# Altium PCB PCB1.PcbDoc
Units mm, origin at the board's own origin, x right, y up, seen from the top; angles counter-clockwise.
Board outline 55 x 64 mm, 2 copper layers (Top Layer, Bottom Layer); 45 components, 38 nets, 202 pads, 156 vias.
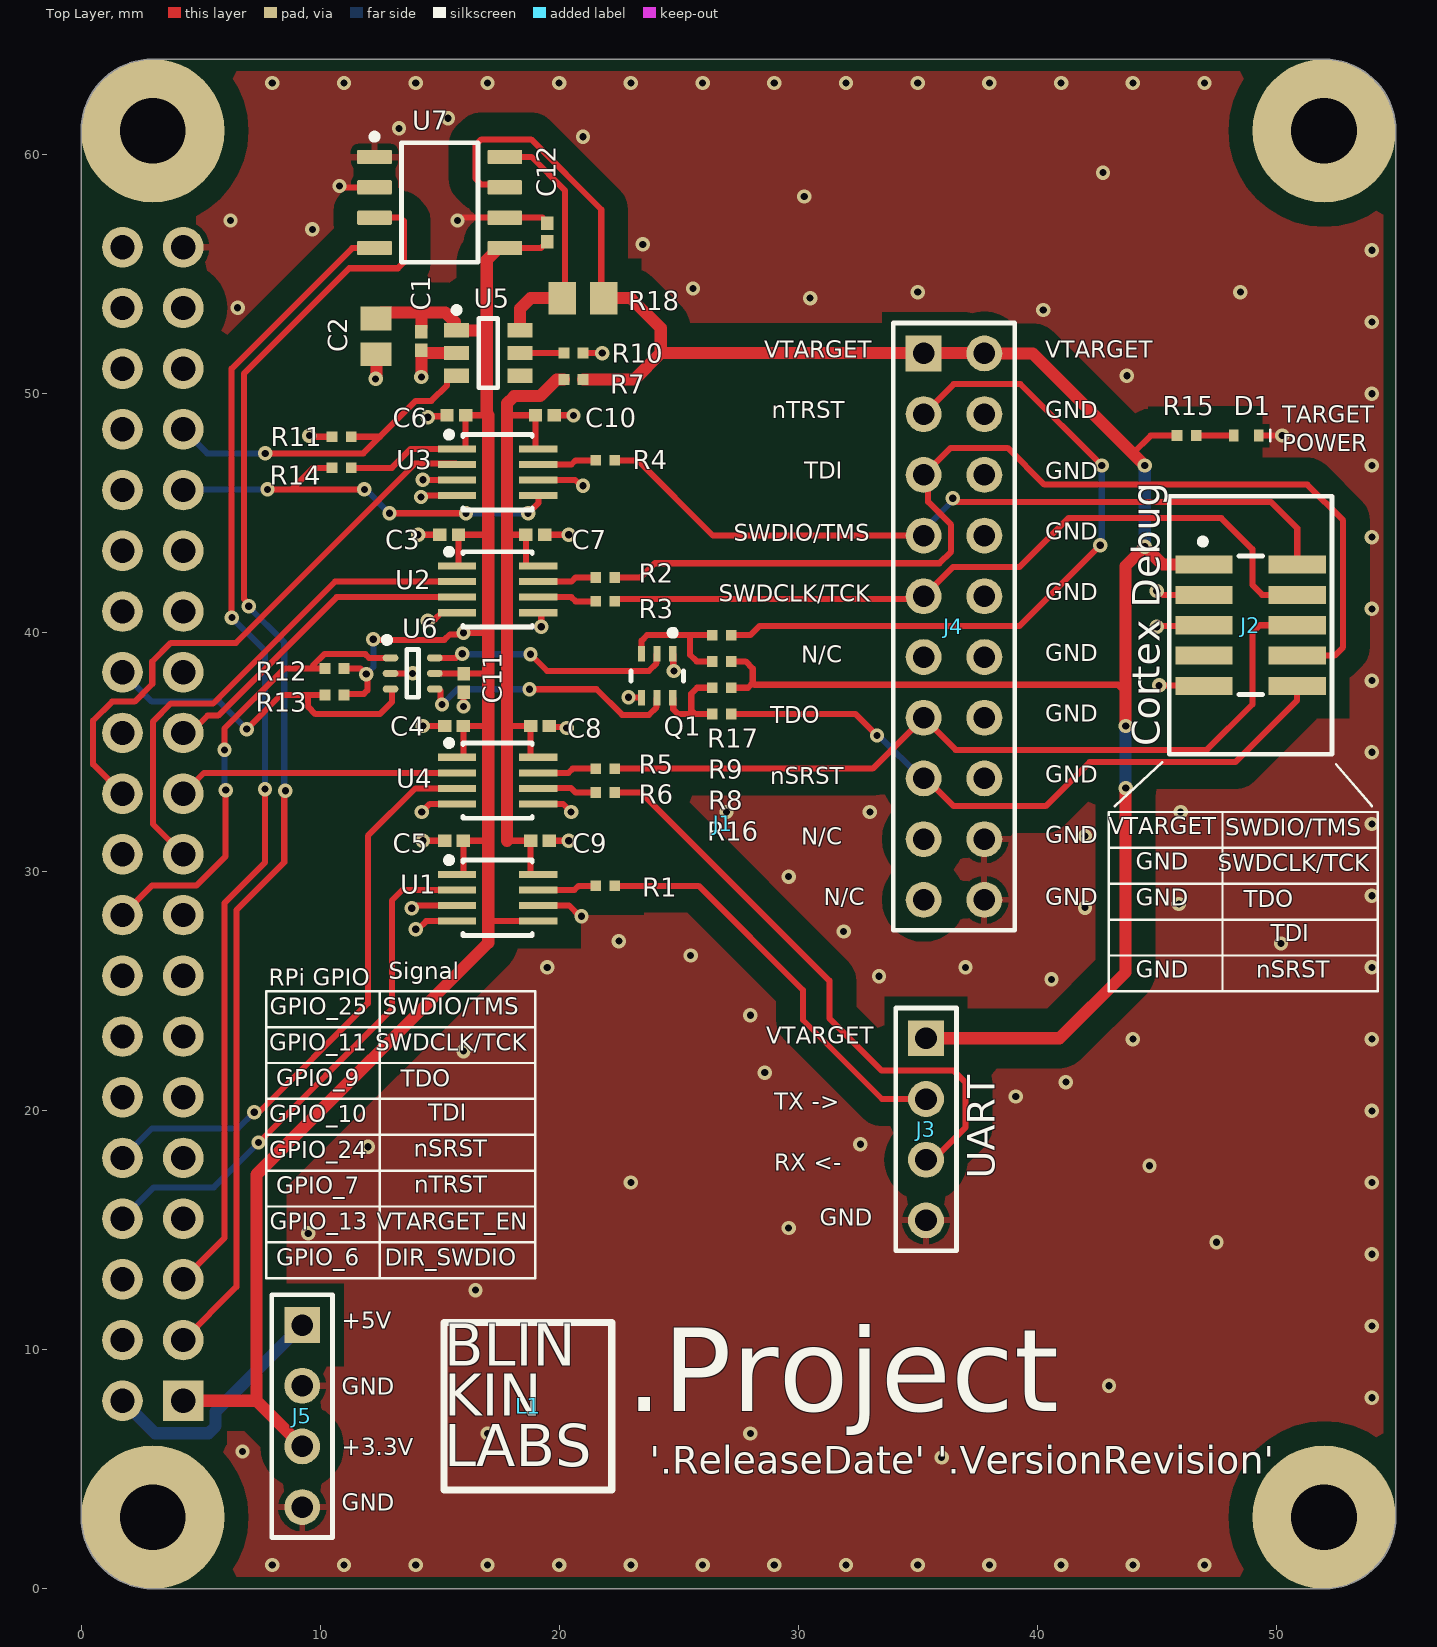
[diagram p0: Top Layer view]
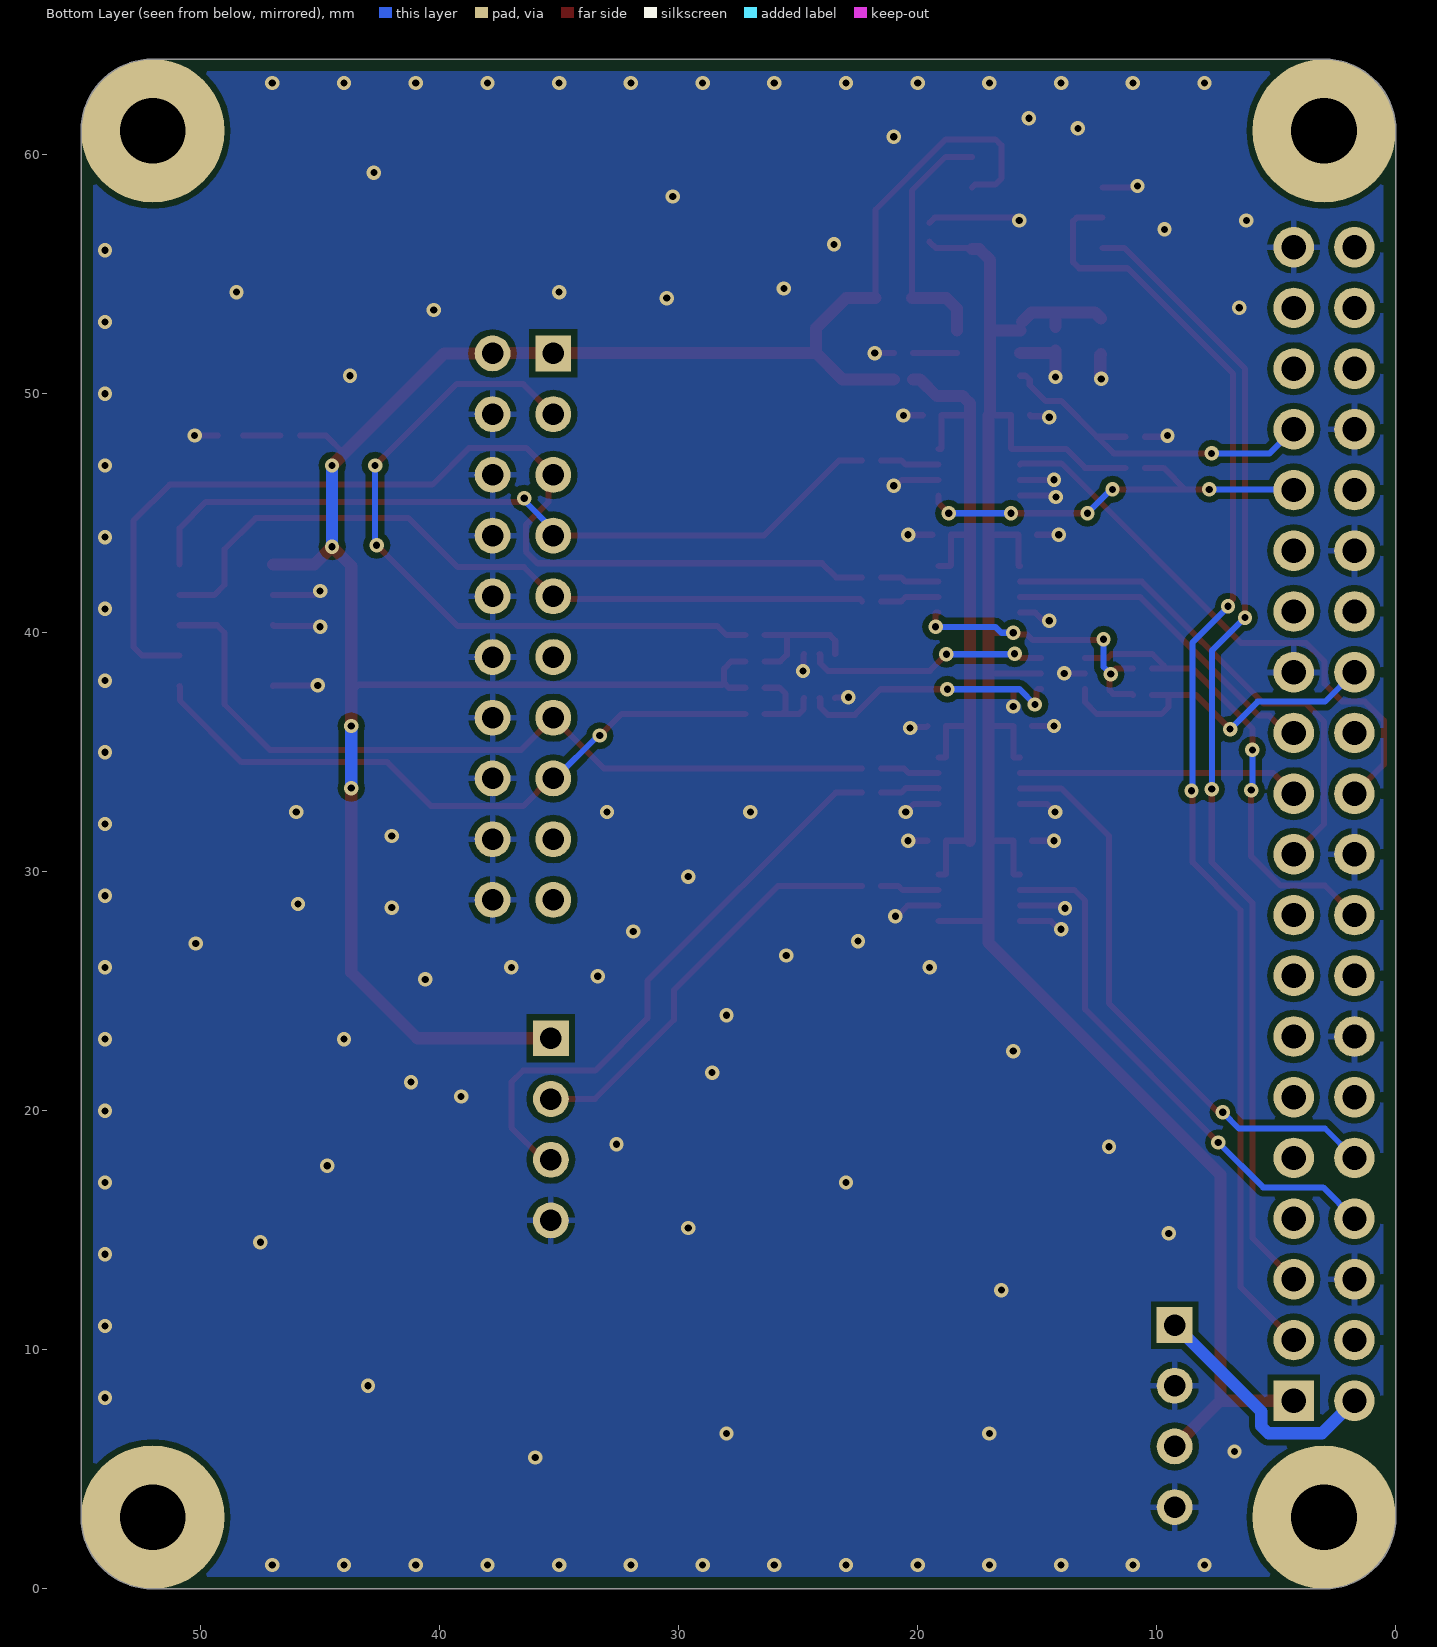
[diagram p1: Bottom Layer view, seen from below]

## Layer stack, top to bottom
Top Solder: solder mask 0.0102, Solder Resist, Dk 3.5
Top Layer: signal copper 0.0356
Dielectric 1: dielectric 0.32, FR-4, Dk 4.8
Bottom Layer: signal copper 0.0356
Bottom Solder: solder mask 0.0102, Solder Resist, Dk 3.5

## Board outline
0,3 0,61 cw(c3,61) 3,64 52,64 cw(c52,61) 55,61 55,3 cw(c52,3) 52,0 3,0 cw(c3,3)

## Design rules (kind name [scope] priority, off if disabled: settings)
BoardOutlineClearance [All] p1: gap=0.508 ignorepadtopadclearanceinfootprint=FALSE
Clearance Clearance_gnd_fill [InNamedPolygon('pg_gnd_fill')] p1: gap=1 ignorepadtopadclearanceinfootprint=FALSE
Clearance [All] p2: gap=0.254 ignorepadtopadclearanceinfootprint=TRUE except(0: Arc-Hole Track-Hole SMDPad-Hole THPad-Hole Via-Hole Fill-Hole Poly-Hole Region-Hole Text-Hole)
HoleSize [All] p1: absolutevalues=TRUE maxlimit=6 minlimit=0.025 maxpercent=80.000 minpercent=20.000
PolygonConnect [All] p1: thpad.connectstyle=Relief thpad.reliefconductorwidth=0.254 thpad.reliefentries=4 thpad.polygonreliefangle="90 Angle" thpad.airgapwidth=0.254 smdpad.connectstyle=Relief smdpad.reliefconductorwidth=0.254 smdpad.reliefentries=4 smdpad.polygonreliefangle="90 Angle" smdpad.airgapwidth=0.254 via.connectstyle=Direct via.reliefconductorwidth=0.254 via.reliefentries=4 via.polygonreliefangle="90 Angle" via.airgapwidth=0.254
RoomDefinition Sheet1 [InComponentClass('Sheet1')] p1: confinementstyle=ConfineIn formatcopy=TRUE lockcomponents=FALSE outline -7.933,-9.529 62.552,-9.529 62.552,71.116 -7.933,71.116
RoutingVias [All] p1: holewidth=0.711 width=1.27 viastyle="Through Hole" minholewidth=0.3 minwidth=0.6 maxholewidth=0.711 maxwidth=1.27
SolderMaskExpansion SolderMaskExpansion_via [isvia] p1: expansion=-99 istentingtop=FALSE
SolderMaskExpansion [All] p2: expansion=0.102 istentingtop=FALSE
SupplyNets "Schematic Supply Nets_4" [InNet('VTARGET_I')] p1: voltage=0.000
SupplyNets "Schematic Supply Nets_3" [InNet('+5V')] p2: voltage=0.000
SupplyNets "Schematic Supply Nets_2" [InNet('+3.3')] p3: voltage=0.000
SupplyNets "Schematic Supply Nets_1" [InNet('GND')] p4: voltage=0.000
SupplyNets "Schematic Supply Nets" [InNet('VTARGET')] p5: voltage=0.000
Width [All] p1: maxlimit=0.508 minlimit=0.254 preferedwidth=0.254
29 further rules are at their usual default settings.

## Components (designator, comment, footprint, x,y, rotation, side; value= is the part's Value field where it differs from the comment)
C1 "0.10uF" CAPC1005X06L 14.235,52.202 r90 top
C2 "10uF" CAPC2012X10L 12.335,52.402 r270 top
C3 "0.10uF" CAPC1005X06L 15.4,44.1 r0 top
C4 "0.10uF" CAPC1005X06L 15.6,36.1 r0 top
C5 "0.10uF" CAPC1005X06L 15.6,31.3 r0 top
C6 "0.10uF" CAPC1005X06L 15.7,49.1 r0 top
C7 "0.10uF" CAPC1005X06L 19,44.1 r180 top
C8 "0.10uF" CAPC1005X06L 19.2,36.1 r180 top
C9 "0.10uF" CAPC1005X06L 19.2,31.3 r180 top
C10 "0.10uF" CAPC1005X06L 19.4,49.1 r180 top
C11 "0.10uF" CAPC1005X06L 16,37.9 r90 top
C12 "0.10uF" CAPC1005X06L 19.5,56.75 r270 top
D1 "BL-HUB37A-AV-TRB" BL-Hxx37A-AV-TRB 48.75,48.25 r0 top
J1 "SC0073" RaspberryPi_Connector 27.5,32 r0 top locked
J2 "FTSH-105-01-L-DV-K-TR" FTSH-105-01-L-DV-K-TR 48.927,40.315 r270 top
J3 "UART" HDR1X4 35.347,23.035 r270 top
J4 "20-pin JTAG/SW" HDR2X10 35.247,51.685 r270 top
J5 "POWER" HDR1X4 9.25,11.04 r270 top
L1 "BLINKINLABS_LOGO" BLINKINLABS_LOGO 18.7,7.65 r0 top
Q1 "NTJD5121NT1G" FP-419B-02-MFG 24.1,38.2 r270 top
R1 "100" ERJ2G(0402)_L 21.927,29.415 r0 top
R2 "100" ERJ2G(0402)_L 21.927,42.315 r0 top
R3 "100" ERJ2G(0402)_L 21.927,41.315 r0 top
R4 "100" ERJ2G(0402)_L 21.927,47.215 r0 top
R5 "100" ERJ2G(0402)_L 21.927,34.315 r0 top
R6 "100" ERJ2G(0402)_L 21.927,33.315 r0 top
R7 "100" ERJ2G(0402)_L 20.6,50.6 r0 top
R8 "10k" ERJ2G(0402)_L 26.8,37.7 r0 top
R9 "10k" ERJ2G(0402)_L 26.8,38.8 r0 top
R10 "20k" ERJ2G(0402)_L 20.6,51.7 r180 top
R11 "10k" ERJ2G(0402)_L 10.9,48.2 r0 top
R12 "10k" ERJ2G(0402)_L 10.6,38.5 r180 top
R13 "10k" ERJ2G(0402)_L 10.6,37.4 r180 top
R14 "10k" ERJ2G(0402)_L 10.9,46.9 r0 top
R15 "1k" ERJ2G(0402)_L 46.25,48.25 r180 top
R16 "100" ERJ2G(0402)_L 26.8,36.6 r0 top
R17 "100" ERJ2G(0402)_L 26.8,39.9 r0 top
R18 "CS05W4F100LT5E" ERJ6G(0805)_N 21,54 r0 top
U1 "SN74LVC2T45DCTR" FP-DCT0008A-MFG 17.427,28.915 r0 top
U2 "SN74LVC2T45DCTR" FP-DCT0008A-MFG 17.427,41.815 r0 top
U3 "SN74LVC2T45DCTR" FP-DCT0008A-MFG 17.427,46.715 r0 top
U4 "SN74LVC2T45DCTR" FP-DCT0008A-MFG 17.427,33.815 r0 top
U5 "AP22653W6-7" SOT95P280X145-6N-5 17.035,51.702 r0 top
U6 "NC7WZ14P6X" TSOP65P210X110-6N 13.871,38.3 r0 top
U7 "INA219AID" D0008A_N 15,58 r0 top

## Footprints (in the part's own frame and the unit in brackets; to place one, negate y for a bottom-side part, rotate by r counter-clockwise, add the part's x,y. Pads: shape width x height; smd on the part's side, far side on the other; paste and mask are expansions set on the pad)
BL-Hxx37A-AV-TRB [mm] "0402 LED, generic"
  rect 0.4x0.5 smd: 1(-0.525,0) 2(0.525,0)
  silkscreen extent 1,-0.25 1,0.25, body extent -0.5,-0.25 0.5,0.25, height 0.4
BLINKINLABS_LOGO [mm] "Square blinkinlabs logo"
  silkscreen extent -3.51,-3.51 3.5,3.5
CAPC1005X06L [mm] "Chip Capacitor, 2-Leads, Body 1.00x0.50mm, IPC High Density"
  rect 0.56x0.52 smd: 1(-0.39,0) 2(0.39,0)
  body extent -0.53,-0.28 0.53,0.28, height 0.55
CAPC2012X10L [mm] "Chip Capacitor, 2-Leads, Body 2.00x1.25mm, IPC High Density"
  rect 1x1.3 smd: 1(-0.75,0) 2(0.75,0)
  body extent -1.05,-0.67 1.05,0.68, height 0.95
D0008A_N [mm] "SOIC, 8-Leads, Body 5x4mm, Pitch 1.27mm, IPC Medium Density"
  rrect17% 1.45x0.6 smd: 1(-2.725,1.905) 2(-2.725,0.635) 3(-2.725,-0.635) 4(-2.725,-1.905) 5(2.725,-1.905) 6(2.725,-0.635) 7(2.725,0.635) 8(2.725,1.905)
  silkscreen extent -2.85,-2.5 1.6,2.88, body extent -3,-2.45 3,2.45, height 1.63
ERJ2G(0402)_L [mm] "Chip Resistor, 2-Leads, Body 1.00x0.50mm, IPC High Density"
  rect 0.45x0.45 smd: 1(-0.4,0) 2(0.4,0)
  body extent -0.53,-0.27 0.53,0.28, height 0.4
ERJ6G(0805)_N [mm] "Chip Resistor, 2-Leads, Body 2.00x1.25mm, IPC Medium Density"
  rect 1.15x1.35 smd: 1(-0.875,0) 2(0.875,0)
  body extent -1.1,-0.67 1.1,0.67, height 0.7
FP-419B-02-MFG [mm]
  rect 0.66x0.3 smd paste+0 mask+0: 1(-0.92,0.65) 2(-0.92,0) 3(-0.92,-0.65) 4(0.92,-0.65) 5(0.92,0) 6(0.92,0.65)
  silkscreen extent -1.92,-1.1 0.22,1.1, body extent -1.35,-1.4 1.35,1.4, height 0.25
FP-DCT0008A-MFG [mm]
  rect 1.6x0.3 smd paste-1000 mask+0: 1(-1.7,0.975) 2(-1.7,0.325) 3(-1.7,-0.325) 4(-1.7,-0.975) 5(1.7,-0.975) 6(1.7,-0.325) 7(1.7,0.325) 8(1.7,0.975)
  silkscreen extent -2.16,-1.58 1.45,1.7, body extent -2.6,-1.68 2.6,1.68, height 0.25
FTSH-105-01-L-DV-K-TR [mm]
  rect 0.76x2.4 smd: 1(-2.54,-1.95) 2(-2.54,1.95) 3(-1.27,-1.95) 4(-1.27,1.95) 5(0,-1.95) 6(0,1.95) 7(1.27,-1.95) 8(1.27,1.95) 9(2.54,-1.95) 10(2.54,1.95)
  silkscreen extent -5.4,-3.4 5.4,3.4, body extent -3.18,-2.92 3.18,2.92, height 6.11
HDR1X4 [mm] "Connector; Header; 4 Position"
  rect 1.5x1.5 hole 0.9: 1(0,0)
  round 1.5 hole 0.9: 2(2.54,0) 3(5.08,0) 4(7.62,0)
  silkscreen extent -1.27,-1.27 8.89,1.27
HDR2X10 [mm] "Connector; Header; 10x2 Position"
  rect 1.5x1.5 hole 0.9: 1(0,0)
  round 1.5 hole 0.9: 2(0,2.54) 3(2.54,0) 4(2.54,2.54) 5(5.08,0) 6(5.08,2.54) 7(7.62,0) 8(7.62,2.54) 9(10.16,0) 10(10.16,2.54) 11(12.7,0) 12(12.7,2.54) 13(15.24,0) 14(15.24,2.54) 15(17.78,0) 16(17.78,2.54) 17(20.32,0) 18(20.32,2.54) 19(22.86,0) 20(22.86,2.54)
  silkscreen extent -1.27,-1.27 24.13,3.81
RaspberryPi_Connector [mm]
  rect 1.7x1.7 hole 1.016 paste-2539.97 mask+0: 1(-23.23,-24.13)
  round 1.7 hole 1.016 paste-2539.97 mask+0: 2(-25.77,-24.13) 3(-23.23,-21.59) 4(-25.77,-21.59) 5(-23.23,-19.05) 6(-25.77,-19.05) 7(-23.23,-16.51) 8(-25.77,-16.51) 9(-23.23,-13.97) 10(-25.77,-13.97) 11(-23.23,-11.43) 12(-25.77,-11.43) 13(-23.23,-8.89) 14(-25.77,-8.89) 15(-23.23,-6.35) 16(-25.77,-6.35) 17(-23.23,-3.81) 18(-25.77,-3.81) 19(-23.23,-1.27) 20(-25.77,-1.27) 21(-23.23,1.27) 22(-25.77,1.27) 23(-23.23,3.81) 24(-25.77,3.81) 25(-23.23,6.35) 26(-25.77,6.35) 27(-23.23,8.89) 28(-25.77,8.89) 29(-23.23,11.43) 30(-25.77,11.43) 31(-23.23,13.97) 32(-25.77,13.97) 33(-23.23,16.51) 34(-25.77,16.51) 35(-23.23,19.05) 36(-25.77,19.05) 37(-23.23,21.59) 38(-25.77,21.59) 39(-23.23,24.13) 40(-25.77,24.13)
  round 6 hole 2.75 unplated paste-2539.97: MNT(-24.5,-29) MNT(-24.5,29) MNT(24.5,-29) MNT(24.5,29)
  body extent -27.04,-25.4 -21.96,25.4, height 8.51
SOT95P280X145-6N-5 [mm] "SOT23, 6-Leads, Body 2.90x2.80mm, Pitch 0.95mm, IPC Medium Density"
  rect 1.05x0.6 smd: 1(-1.325,0.95) 2(-1.325,0) 3(-1.325,-0.95) 4(1.325,-0.95) 5(1.325,0) 6(1.325,0.95)
  silkscreen extent -1.45,-1.45 0.4,1.92, body extent -1.4,-1.45 1.4,1.45, height 1.45
TSOP65P210X110-6N [mm] "TSOP, 6-Leads, Body 2.00x1.25mm, Pitch 0.65mm, IPC Medium Density"
  oval 0.66x0.3 smd: 1(-0.925,0.65) 2(-0.925,0) 3(-0.925,-0.65) 4(0.925,-0.65) 5(0.925,0) 6(0.925,0.65)
  silkscreen extent -1.2,-1 0.25,1.52, body extent -1.04,-1 1.04,1, height 1.1

## Part data
C1 C3 C4 C5 C6 C7 C8 C9 C10 C11 C12: library part GRM155R61C104KA88D, "CAP CER 0.1UF 16V X5R 0402", Case/Package="0402 (1005 Metric)", Manufacturer 1="Murata Electronics North America", Supplier Part Number 1=490-5415-1-ND, Temperature Coefficient=X5R, Tolerance=±10%, Voltage=16V, Manufacturer Part Number 1=GRM155R61C104KA88D, Part Name=GRM155R61C104KA88D, Supplier 1=DigiKey
C2: library part GRM21BR71A106KE51L, "CAP CER 10UF 10V X7R 0805", Case/Package="0805 (2012 Metric)", Manufacturer 1="Murata Electronics North America", Supplier Part Number 1=490-3905-1-ND, Temperature Coefficient=X7R, Tolerance=±10%, Voltage=10V, Manufacturer Part Number 1=GRM21BR71A106KE51L, Part Name=GRM21BR71A106KE51L, Supplier 1=DigiKey
D1: "LED, 0402, Super Red, 50mcd@20mA, 627~637nm", Manufacturer 1=BrtLed, Supplier Part Number 1=C165980, id=80, Manufacturer Part Number 1=BL-HUB37A-AV-TRB, Part Name=BL-HUB37A-AV-TRB, Supplier 1=LCSC
J1: "Raspberry Pi shield Header", Manufacturer 1="Raspberry Pi", Supplier Part Number 1=2648-SC0073-ND, id=245, Manufacturer Part Number 1=SC0073, Part Name=SC0073, Supplier 1=DigiKey
J2: "1.27mm 2 10P -55℃~+125℃ Standing paste 3.4A SMD,P=1.27mm Board-to-Board and Backplane Connector ROHS", Manufacturer 1=Samtec, Supplier Part Number 1=C448647, id=375, Manufacturer Part Number 1=FTSH-105-01-L-DV-K-TR, Part Name=FTSH-105-01-L-DV-K-TR, Supplier 1=LCSC, Supplier 2=DigiKey, Supplier Part Number 2=SAM13165CT-ND
J3 J5: library part "Header 4", "Header, 4-Pin", LatestRevisionDate=17-Jul-2002, LatestRevisionNote="Re-released for DXP Platform.", Publisher="Altium Limited"
J4: library part "Header 10X2", LatestRevisionDate=17-Jul-2002, LatestRevisionNote="Re-released for DXP Platform.", Publisher="Altium Limited"
L1: "Square logo"
Q1: "Mosfet Array 60V 295mA 250mW Surface Mount SC-88/SC70-6/SOT-363", Case/Package="6-TSSOP, SC-88, SOT-363", Manufacturer 1=onsemi, Manufacturer Case/Package 1=SC-88/SC70-6/SOT-363, Supplier Part Number 1=NTJD5121NT1GOSCT-ND, id=376, Manufacturer Part Number 1=NTJD5121NT1G, Part Name=NTJD5121NT1G, Supplier 1=DigiKey, Supplier 2=LCSC, Supplier Part Number 2=C15215
R1 R2 R3 R4 R5 R6 R7 R16 R17: library part ERJ-2GEJ101X, "RES SMD 100 OHM 5% 1/10W 0402", Case/Package="0402 (1005 Metric)", Manufacturer 1="Panasonic Electronic Components", Power (Watts)="0.1W, 1/10W", Supplier Part Number 1=P100JCT-ND, Tolerance=±5%, Manufacturer Part Number 1=ERJ-2GEJ101X, Part Name=ERJ-2GEJ101X, Supplier 1=Digikey
R8 R9 R11 R12 R13 R14: library part ERJ-PA2J103X, "RES SMD 10K OHM 5% 1/5W 0402", Case/Package="0402 (1005 Metric)", Manufacturer 1="Panasonic Electronic Components", Power (Watts)="0.2W, 1/5W", Supplier Part Number 1=P17199CT-ND, Tolerance=±5%, Manufacturer Part Number 1=ERJ-PA2J103X, Part Name=ERJ-PA2J103X, Supplier 1=Digikey
R10: library part ERJ-2RKF2002X, "RES SMD 20K OHM 1% 1/10W 0402", Case/Package="0402 (1005 Metric)", Manufacturer 1="Panasonic Electronic Components", Power (Watts)="0.1W, 1/10W", Supplier Part Number 1=P20.0KLCT-ND, Tolerance=±1%, Manufacturer Part Number 1=ERJ-2RKF2002X, Part Name=ERJ-2RKF2002X, Supplier 1=Digikey
R15: library part ERJ-2GEJ102X, "RES SMD 1K OHM 5% 1/10W 0402", Case/Package="0402 (1005 Metric)", Manufacturer 1="Panasonic Electronic Components", Power (Watts)="0.1W, 1/10W", Supplier Part Number 1=P1.0KJCT-ND, Tolerance=±5%, Manufacturer Part Number 1=ERJ-2GEJ102X, Part Name=ERJ-2GEJ102X, Supplier 1=Digikey
R18: "250mW Thick Film Resistors 500V ±1% 100mΩ 0805 Chip Resistor - Surface Mount ROHS", Manufacturer 1=UNI-ROYAL, Manufacturer Case/Package 1=0805, Supplier Part Number 1=C474291, id=379, Manufacturer Part Number 1=CS05W4F100LT5E, Part Name=CS05W4F100LT5E, Supplier 1=LCSC
U1 U2 U3 U4: "Voltage Level Translator Bidirectional 1 Circuit 2 Channel 420Mbps SM8", Case/Package="8-LSSOP, 8-MSOP", Manufacturer 1="Texas Instruments", Manufacturer Case/Package 1=SM8, Supplier Part Number 1=296-16845-1-ND, id=378, Manufacturer Part Number 1=SN74LVC2T45DCTR, Part Name=SN74LVC2T45DCTR, Supplier 1=DigiKey, Supplier 2=LCSC, Supplier Part Number 2=C22672
U5: "LOAD SWITCH,SOT26,T&R,3K", Manufacturer 1="Diodes Incorporated", Supplier Part Number 1=31-AP22653W6-7TR-ND, id=55, Manufacturer Part Number 1=AP22653W6-7, Part Name=AP22653W6-7, Supplier 1=DigiKey, Supplier 2=LCSC, Supplier Part Number 2=C2158037
U6: "Inverter IC 2 Channel Schmitt Trigger SC-88 (SC-70-6)", Case/Package="6-TSSOP, SC-88, SOT-363", Manufacturer 1=onsemi, Manufacturer Case/Package 1="SC-88 (SC-70-6)", Supplier Part Number 1=NC7WZ14P6XCT-ND, id=377, Manufacturer Part Number 1=NC7WZ14P6X, Part Name=NC7WZ14P6X, Supplier 1=DigiKey, Supplier 2=LCSC, Supplier Part Number 2=C19829571
U7: "Current Monitor Regulator High-Side 10mA 8-SOIC", Case/Package=8-SOIC, Manufacturer 1="Texas Instruments", Supplier Part Number 1=296-33291-5-ND, id=370, Manufacturer Part Number 1=INA219AID, Part Name=INA219AID, Supplier 1=DigiKey

## Via types
v1: diameter 0.6, hole 0.3, Top Layer to Bottom Layer, 156 vias

## Nets (pads, with @x,y where several pads share a name; then routed paths per layer and width w, separated by ;. In a path a pad name is that pad's centre, name@x,y a point inside that pad or via, vN(x,y) a via of type N, cw(c..) or ccw(c..) an arc to the next point about the centre after c; other vN are vias at no path point)
+3.3: C1.2 C2.1 C3.2 C4.2 C5.2 C6.2 C11.2 C12.2 J1.1 J5.3 R12.1 R13.1 R14.2 U1.1 U1.5 U2.1 U2.5 U3.1 U4.1 U5.1 U6.5 U7.5 | length 99.1
  Top Layer w0.254: R13.1 11.043,37.443 11.825,37.443 11.974,37.591 11.974,38.223 v1(11.927,38.27) 11.697,38.5 R12.1 ; R14.2 13,46.9 13.79,47.69 U3.1 16.067,47.69 16.09,47.713 C6.2 17.035,49.1 ; v1(12.225,39.732) 12.257,39.7 15.2,39.7 15.434,39.934 15.934,39.934 v1(16,40) 17.035,40 ; U6.5@14.85,38.3 14.855,38.295 15.995,38.295 C11.2 17.025,38.29 17.035,38.3 ; U1.1 15.967,29.89 15.99,29.913 C5.2 17.035,31.3 ; U4.1 15.967,34.79 15.99,34.813 C4.2 17.035,36.1 ; U2.1 15.767,42.79 15.79,42.813 C3.2 17.035,44.1 ; 16.995,34.79 17.035,34.75 ; 16.995,42.79 17.035,42.75 ; 16.995,47.69 17.035,47.65 ; 17.035,27.9 17.075,27.94 U1.5 ; U7.5 19.235,56.095 19.347,56.207 19.367,56.207 19.5,56.34 C12.2 ; U2.5 19.227,40.84 19.25,40.817 v1(19.25,40.25)
  Top Layer w0.508: J1.1 7.34,7.87 ; J5.3 7.34,7.87 ; C2.1 12.581,53.398 13.331,53.398 13.335,53.402 14.285,53.402 ; C1.2@14.235,52.802 14.235,53.352 14.285,53.402 ; 15.635,53.002 15.235,53.402 14.285,53.402 ; U5.1 16.893,52.652 16.97,52.575 ; U7.5@17.725,56.049 17.424,56.049 16.97,55.595 16.97,52.575 ; 7.34,7.87 7.34,17.34 17.035,27.035 17.035,27.9 17.035,31.3 17.035,34.75 17.035,36.1 17.035,38.3 17.035,40 17.035,42.75 17.035,44.1 17.035,47.65 17.035,49.1 16.97,49.165 16.97,52.575
  Bottom Layer w0.254: v1(11.927,38.27) 12.225,38.568 v1(12.225,39.732) ; v1(16,40) 16.5,40 16.75,40.25 v1(19.25,40.25)
+5V: J1.2 J5.1 | length 10.3
  Bottom Layer w0.508: J1.2 3.088,6.512 5.33,6.512 5.628,6.81 5.628,7.418 J5.1
DIR_SWDIO/TMS: J1.31 R14.1 U3.5 | length 17.9
  Top Layer w0.254: v1@7.8,45.985 8.8,45.985 ; R14.1 9.715,46.9 8.8,45.985 ; v1(11.85,46) 11.835,45.985 8.8,45.985 ; v1(12.9,45) v1(16.1,45) ; v1(18.7,45) 19.127,45.427 U3.5
  Bottom Layer w0.254: J1.31 4.3,46 v1(7.8,46) ; v1(11.85,46) 11.9,46 v1(12.9,45) ; v1(16.1,45) v1(18.7,45)
GND: C1.1 C2.2 C3.1 C4.1 C5.1 C6.1 C7.1 C8.1 C9.1 C10.1 C11.1 C12.1 D1.2 J1.6 J1.14 J1.20 J1.25 J1.30 J1.34 J1.39 J2.3 J2.5 J2.9 J3.4 J4.4 J4.6 J4.8 J4.10 J4.12 J4.14 J4.16 J4.18 J4.20 J5.2 J5.4 Q1.1 Q1.4 R10.1 R11.1 U1.3 U1.4 U1.6 U2.4 U3.3 U3.4 U3.6 U4.4 U4.5 U5.2 U6.2 U7.1 U7.2 U7.6 | length 42.8
  Top Layer w0.254: v1(9.549,48.249) 9.598,48.2 R11.1 ; v1@10.75,58.75 10.865,58.635 U7.2 ; U6.2@13,38.3 v1(13.871,38.3) v1@13.9,38.3 ; v1(13.836,28.473) 13.93,28.473 14.047,28.59 U1.3 ; v1(14,27.6) 14.094,27.6 14.434,27.94 U1.4 ; v1(14.1,44.1) C3.1 ; v1(14.218,45.681) 14.257,45.719 14.45,45.719 14.471,45.74 U3.4 ; v1(14.25,32.5) 14.59,32.84 U4.4 ; v1(14.3,31.3) C5.1 ; v1(14.3,36.1) C4.1 ; v1(14.3,46.4) 15.717,46.4 U3.3 ; v1(14.5,40.5) 14.566,40.566 14.803,40.566 15.077,40.84 U2.4 ; v1@14.5,49 v1(14.5,49.019) 14.54,49.06 15.269,49.06 C6.1 ; v1(15.75,57.25) 15.865,57.365 U7.6 19.295,57.365 19.5,57.16 C12.1 ; v1(16,36.914) C11.1 ; U1.6 20.416,28.59 20.864,28.142 v1(20.934,28.142) ; U4.5 20.16,32.84 v1(20.5,32.5) ; U3.6 20.666,46.39 20.906,46.15 v1(21,46.15) ; C7.1 v1(20.4,44.1) ; C9.1 v1(20.4,31.3) ; C8.1 19.631,36.059 20.278,36.059 v1(20.318,36.019) ; C10.1 20.592,49.1 v1(20.6,49.092) ; R10.1 v1(21.8,51.7) ; v1(22.9,37.3) 22.91,37.29 23.44,37.29 Q1.4 ; Q1.1 24.773,39.097 24.773,38.427 v1(24.8,38.4) ; v1(45,40.25) 45.032,40.282 46.944,40.282 J2.5 ; v1(45,41.75) 45.094,41.75 45.259,41.585 J2.3 ; v1(45.1,37.8) 45.112,37.787 46.965,37.787 J2.9 ; D1.2 v1(50.25,48.25)
  Top Layer w0.508: v1(12.323,50.623) 12.364,50.664 12.364,51.623 C2.2 ; v1(14.235,50.702) C1.1@14.235,51.792 ; C1.1@14.235,51.804 C1.1@14.235,51.792 ; U5.2 14.325,51.702 C1.1@14.235,51.792
  other v1: 8,1 11,1 14,1 17,1 20,1 23,1 26,1 29,1 32,1 35,1 38,1 41,1 44,1 47,1 36,5.5 6.75,5.75 17,6.5 28,6.5 54,8 43,8.5 54,11 16.5,12.5 54,14 47.5,14.5 9.5,14.875 29.6,15.1 23,17 54,17 44.7,17.7 12,18.5 32.6,18.6 54,20 39.1,20.6 41.2,21.2 28.6,21.6 16,22.5 44,23 54,23 28,24 40.6,25.5 33.382,25.633 19.5,26 37,26 54,26 25.5,26.5 50.2,27 22.5,27.1 31.9,27.5 42,28.5 45.925,28.65 54,29 29.6,29.8 42,31.5 54,32 27,32.5 33,32.5 46,32.5 54,35 54,38 54,41 54,44 54,47 54,50 43.75,50.75 54,53 40.25,53.5 6.55,53.6 30.5,54 35,54.25 48.5,54.25 25.6,54.4 54,56 23.5,56.25 9.675,56.875 6.25,57.25 30.25,58.25 10.807,58.693 42.75,59.25 21,60.75 13.3,61.1 15.35,61.525 8,63 11,63 14,63 17,63 20,63 23,63 26,63 29,63 32,63 35,63 38,63 41,63 44,63 47,63
I2C1_SCL: J1.5 U7.4 | length 48.2
  Top Layer w0.254: J1.5 5.992,14.672 5.992,28.692 7.7,30.4 7.7,33.455 v1(7.696,33.459) ; v1(6.31,40.633) 6.3,40.643 6.3,51.05 11.345,56.095 U7.4
  Bottom Layer w0.254: v1(6.31,40.633) 7.696,39.247 v1(7.696,33.459)
I2C1_SDA: J1.3 U7.3 | length 54.6
  Top Layer w0.254: J1.3 6.5,12.64 6.5,28.4 8.5,30.4 8.5,33.347 v1(8.547,33.394) ; v1(7.017,41.112) 7.017,41.205 6.808,41.414 6.808,50.84 11.218,55.25 13.25,55.25 13.5,55.5 13.5,57.216 13.351,57.365 U7.3
  Bottom Layer w0.254: v1(7.017,41.112) 7.003,41.097 8.5,39.6 8.5,33.441 v1(8.547,33.394)
NetD1_1: D1.1 R15.1 | length 1.6
  Top Layer w0.254: R15.1 D1.1
NetQ1_2: Q1.2 U6.6 | length 10.1
  Top Layer w0.254: U6.6@14.85,38.95 15.679,38.95 15.853,39.124 v1(15.947,39.124) ; v1(18.8,39.1) 19.491,38.409 23.758,38.409 24.077,38.728 24.077,39.097 Q1.2
  Bottom Layer w0.254: v1(15.947,39.124) 15.971,39.1 v1(18.8,39.1)
NetQ1_3: Q1.3 R9.1 R17.1 | length 5.5
  Top Layer w0.254: Q1.3 23.45,39.675 23.675,39.9 25.475,39.9 ; R9.1 25.75,38.8 25.475,39.075 25.475,39.9 ; R17.1 25.475,39.9
NetQ1_5: Q1.5 U6.4 | length 11
  Top Layer w0.254: U6.4@14.85,37.65 14.961,37.65 15.034,37.577 15.034,37.066 v1(15.1,37) ; v1(18.757,37.638) 21.562,37.638 22.631,36.569 23.758,36.569 24.077,36.888 24.077,37.257 Q1.5
  Bottom Layer w0.254: v1(15.1,37) 15.738,37.638 v1(18.757,37.638)
NetQ1_6: Q1.6 R8.1 R16.1 | length 4.1
  Top Layer w0.254: Q1.6 24.773,37.257 24.773,36.802 24.975,36.6 25.688,36.6 ; R16.1 25.688,36.6 ; R8.1 25.775,37.7 25.525,37.45 25.525,36.763 25.688,36.6
NetR1_1: R1.1 U1.7 | length 2.5
  Top Layer w0.254: U1.7 20.64,29.24 20.815,29.415 R1.1
NetR2_1: R2.1 U2.7 | length 2.5
  Top Layer w0.254: U2.7 20.516,42.14 20.69,42.315 R2.1
NetR3_1: R3.1 U2.6 | length 2.5
  Top Layer w0.254: U2.6 20.51,41.49 20.685,41.315 R3.1
NetR4_1: R4.1 U3.7 | length 2.5
  Top Layer w0.254: U3.7 20.515,47.04 20.69,47.215 R4.1
NetR5_1: R5.1 U4.7 | length 2.5
  Top Layer w0.254: U4.7 20.39,34.14 20.565,34.315 R5.1
NetR6_1: R6.1 U4.6 | length 2.5
  Top Layer w0.254: U4.6 19.137,33.5 20.5,33.5 20.685,33.315 R6.1
NetR10_2: R10.2 U5.5 | length 1.8
  Top Layer w0.254: U5.5 18.361,51.701 R10.2 R10.2
NetR18_1: R18.1 U5.6 U7.8 | length 10.6
  Top Layer w0.254: U7.8 18.845,59.905 20.24,58.51 R18.1@20.24,54
  Top Layer w0.508: U5.6 18.36,53.56 18.8,54 R18.1@20.24,54
nSRST: J1.18 R12.2 U6.1 | length 19.6
  Top Layer w0.254: J1.18 2.961,29.421 4.821,29.421 6.049,30.649 v1(6.049,33.416) ; v1(6,35.1) 6,36 8.5,38.5 9.7,38.5 ; R12.2 9.7,38.5 ; U6.1@12.999,38.951 12.043,38.951 11.888,39.106 10.176,39.106 9.7,38.63 9.7,38.5
  Bottom Layer w0.254: v1(6,35.1) 6,33.465 v1(6.049,33.416)
nSRST_B: J2.10 J4.15 R16.2 | length 27.7
  Top Layer w0.254: R16.2 32.4,36.6 v1(33.3,35.7) ; J4.15 35.345,33.905 36.5,32.75 40.35,32.75 42.192,34.592 48.292,34.592 50.863,37.163 50.863,37.761 J2.10
  Bottom Layer w0.254: v1(33.3,35.7) 33.376,35.7 35.171,33.905 J4.15
nTRST: J1.26 R13.2 U6.3 | length 14.9
  Top Layer w0.254: v1(6.932,35.968) 8.363,37.4 9.5,37.4 ; R13.2 9.5,37.4 ; U6.3@13,37.65 13,37.1 12.5,36.6 9.8,36.6 9.5,36.9 9.5,37.4
  Bottom Layer w0.254: J1.26 2.961,37.119 5.781,37.119 v1(6.932,35.968)
nTRST_B: J4.3 R17.2 | length 29.7
  Top Layer w0.254: R17.2 28,39.9 28.375,40.275 39.25,40.275 v1(42.638,43.663) ; J4.3 36.502,50.4 39.3,50.4 v1(42.7,47)
  Bottom Layer w0.254: v1(42.638,43.663) 42.7,43.725 v1(42.7,47)
SWDCLK/TCK: J1.23 U2.3 | length 13.8
  Top Layer w0.254: J1.23 4.565,35.81 5.288,36.533 5.733,36.533 10.69,41.49 U2.3
SWDCLK/TCK_B: J2.4 J4.9 R3.2 | length 32.2
  Top Layer w0.254: R3.2 22.425,41.413 35.135,41.413 J4.9 36.472,42.75 39.25,42.75 41.3,44.8 47.7,44.8 49,43.5 49,42 49.415,41.585 J2.4
SWDIO/TMS: J1.22 U3.2 | length 23.8
  Top Layer w0.254: J1.22 0.5,34.5 0.5,35.299 0.499,35.3 0.499,36.32 1.298,37.119 2.24,37.119 2.977,37.856 2.977,38.798 3.76,39.581 6.481,39.581 13.981,47.081 15.686,47.081 U3.2
SWDIO/TMS_B: J2.2 J4.7 R4.2 | length 32.7
  Top Layer w0.254: R4.2 22.452,47.215 23.285,47.215 26.435,44.065 J4.7 ; v1(36.463,45.626) 36.615,45.474 49.776,45.474 50.877,44.373 J2.2
  Bottom Layer w0.254: J4.7 35.247,44.317 36.463,45.532 v1(36.463,45.626)
TDI: J1.19 U2.2 | length 21.2
  Top Layer w0.254: J1.19 3,32 3,36.281 3.76,37.041 5.523,37.041 10.622,42.14 U2.2
TDI_B: J2.8 J4.5 R2.2 | length 44.8
  Top Layer w0.254: R2.2 23.415,42.315 24.007,42.907 35.907,42.907 36.395,43.395 36.395,44.517 35.437,45.474 35.437,46.415 J4.5 36.378,47.736 38.764,47.736 40.3,46.2 51.3,46.2 52.8,44.7 52.8,39.4 52.445,39.045 J2.8
TDO: J1.21 U4.2 | length 11.8
  Top Layer w0.254: J1.21@4.271,33.27 5.141,34.14 U4.2
TDO_B: J2.6 J4.13 R5.2 | length 33.9
  Top Layer w0.254: R5.2 33.117,34.315 J4.13 36.592,35.1 47.1,35.1 49,37 49,40 49.315,40.315 J2.6
UART_RX: J1.10 U4.3 | length 24.5
  Top Layer w0.254: v1(7.242,19.942) v1@7.417,19.942 ; v1@7.43,19.93 12,24.5 12,31.5 13.99,33.49 U4.3
  Bottom Layer w0.254: J1.10 2.961,19.261 6.561,19.261 v1(7.242,19.942)
UART_RX_B: J3.3 R6.2 | length 24.7
  Top Layer w0.254: R6.2 23.435,33.315 31.308,25.442 31.308,23.874 33.497,21.685 36.512,21.685 36.997,21.2 36.997,19.297 35.655,17.955 J3.3
UART_TX: J1.8 U1.2 | length 22.4
  Top Layer w0.254: v1(7.425,18.675) 13,24.25 13,28.8 13.44,29.24 U1.2
  Bottom Layer w0.254: J1.8 3.039,16.799 5.549,16.799 v1(7.425,18.675)
UART_TX_B: J3.2 R1.2 | length 17.4
  Top Layer w0.254: R1.2 25.835,29.415 30.2,25.05 30.2,23.8 33.505,20.495 J3.2
VTARGET: J2.1 J3.1 J4.1 J4.2 R7.2 R8.2 R9.2 R15.2 R18.2 U7.7 | length 97.4
  Top Layer w0.254: U7.7 17.61,58.75 16.75,58.75 16.5,59 16.5,60.4 16.745,60.645 18.824,60.645 21.76,57.708 R18.2@21.76,54 ; R8.2 27.9,37.7 28.1,37.9 ; R9.2 27.8,38.8 28.1,38.5 28.1,37.9 ; 43.7,37.5 43.375,37.825 28.6,37.825 28.175,37.825 28.1,37.9 ; 44,47.5 44.75,48.25 R15.2
  Top Layer w0.508: R7.2 23.15,50.6 24.25,51.7 ; R18.2@21.76,54 23,54 24.25,52.75 24.25,51.7 ; J3.1 40.935,23.035 43.7,25.8 v1(43.7,33.5) ; v1(43.7,36.1) 43.7,37.5 43.7,42.8 v1(44.5,43.6) 45.245,42.855 J2.1 ; v1(44.5,47) 44,47.5 39.815,51.685 J4.2 37.772,51.7 35.247,51.7 24.25,51.7
  Bottom Layer w0.508: v1(43.7,33.5) v1(43.7,36.1) ; v1(44.5,43.6) v1(44.5,47)
VTARGET_EN: J1.33 R11.2 U5.3 | length 14.5
  Top Layer w0.254: v1(7.706,47.506) 11.806,47.506 12.5,48.2 ; R11.2 12.5,48.2 ; U5.3 15.485,50.752 15.312,50.579 15.312,50.354 14.658,49.7 14,49.7 12.5,48.2
  Bottom Layer w0.254: J1.33 5.274,47.506 v1(7.706,47.506)
VTARGET_I: C7.2 C8.2 C9.2 C10.2 R7.1 U1.8 U2.8 U3.8 U4.8 | length 31.9
  Top Layer w0.254: 17.819,31.3 C9.2 18.81,29.913 18.833,29.89 U1.8 ; 17.819,34.75 17.859,34.79 ; 17.819,36.1 C8.2 18.81,34.813 18.833,34.79 U4.8 ; 17.819,42.75 17.859,42.79 ; 17.819,44.1 C7.2 18.61,42.813 18.633,42.79 U2.8 ; 17.819,47.65 17.859,47.69 ; 17.819,49.1 C10.2 19.01,47.713 19.033,47.69 U3.8
  Top Layer w0.508: 17.819,31.3 17.819,34.75 17.819,36.1 17.819,42.75 17.819,44.1 17.819,47.65 17.819,49.1 17.819,49.602 18.117,49.9 19.2,49.9 19.9,50.6 R7.1
pads on no net: J1.4 J1.7 J1.9 J1.11 J1.12 J1.13 J1.15 J1.16 J1.17 J1.24 J1.27 J1.28 J1.29 J1.32 J1.35 J1.36 J1.37 J1.38 J1.40 J1.MNT J2.7 J4.11 J4.17 J4.19 U5.4

## Polygon pours and split planes (outlines as drawn)
GND on Bottom Layer "NONET_L02_P-001" (solid, remove dead copper, pour order 0): 0,0 55,0 55,64 0,64
GND on Top Layer "pg_gnd_fill" (solid, remove dead copper, pour order 1): 0,0 55,0 55,64 0,64

## Silkscreen, mask and mechanical layers (free items; w line width, h text height)
Top Overlay:
  lines w0.1: 7.75,14.5 19,14.5 ; 7.75,16 19,16 ; 7.75,17.5 19,17.5 ; 7.75,19 19,19 ; 7.75,20.5 19,20.5 ; 7.75,22 19,22 ; 7.75,23.5 19,23.5 ; 12.5,13 12.5,25 ; 43,26.5 54.25,26.5 ; 43,28 54.25,28 ; 43,29.5 54.25,29.5 ; 43,31 54.25,31 ; 43.25,32.75 45.242,34.592 ; 47.75,25 47.75,32.5 ; 52.5,34.5 54,32.75 ; 7.75,13 19,13 19,25 7.75,25 7.75,13 ; 43,25 43,32.5 54.25,32.5 54.25,25 43,25
  text "VTARGET" at 28.574,51.281 h1.2
  text "VTARGET" at 40.327,51.281 h1.2
  text "nTRST" at 28.897,48.741 h1.2
  text "GND" at 40.327,48.741 h1.2
  text "TARGET / POWER" at 50.25,47.365 h1.2
  text "TDI" at 30.26,46.217 h1.2
  text "GND" at 40.327,46.201 h1.2
  text "GND" at 40.327,43.661 h1.2
  text "SWDIO/TMS" at 27.296,43.602 h1.2
  text "GND" at 40.327,41.121 h1.2
  text "SWDCLK/TCK" at 26.678,41.062 h1.2
  text "GND" at 40.327,38.581 h1.2
  text "N/C" at 30.126,38.522 h1.2
  text "GND" at 40.327,36.041 h1.2
  text "TDO" at 28.833,35.982 h1.2
  text "Cortex Debug" at 45.517,35.25 h2 r90
  text "GND" at 40.327,33.501 h1.2
  text "nSRST" at 28.833,33.442 h1.2
  text "VTARGET" at 43.001,31.346 h1.2
  text "SWDIO/TMS" at 47.862,31.287 h1.2
  text "GND" at 40.327,30.961 h1.2
  text "N/C" at 30.126,30.902 h1.2
  text "GND" at 44.114,29.846 h1.2
  text "SWDCLK/TCK" at 47.553,29.787 h1.2
  text "N/C" at 31.075,28.362 h1.2
  text "GND" at 40.327,28.362 h1.2
  text "GND" at 44.114,28.346 h1.2
  text "TDO" at 48.631,28.287 h1.2
  text "TDI" at 49.775,26.862 h1.2
  text "GND" at 44.114,25.346 h1.2
  text "nSRST" at 49.173,25.346 h1.2
  text "Signal" at 12.861,25.27 h1.2
  text "RPi GPIO" at 7.859,25.009 h1.2
  text "GPIO_25" at 7.883,23.793 h1.2
  text "SWDIO/TMS" at 12.612,23.787 h1.2
  text "VTARGET" at 28.674,22.572 h1.2
  text "GPIO_11" at 7.875,22.293 h1.2
  text "SWDCLK/TCK" at 12.303,22.287 h1.2
  text "GPIO_9" at 8.16,20.793 h1.2
  text "TDO" at 13.381,20.787 h1.2
  text "TX ->" at 28.997,19.809 h1.2
  text "TDI" at 14.525,19.362 h1.2
  text "GPIO_10" at 7.88,19.293 h1.2
  text "nSRST" at 13.923,17.846 h1.2
  text "GPIO_24" at 7.878,17.793 h1.2
  text "RX <-" at 28.997,17.269 h1.2
  text "UART" at 38.618,17.15 h2 r90
  text "nTRST" at 13.937,16.346 h1.2
  text "GPIO_7" at 8.164,16.293 h1.2
  text "GND" at 30.898,14.952 h1.2
  text "GPIO_13" at 7.894,14.793 h1.2
  text "VTARGET_EN" at 12.367,14.793 h1.2
  text "GPIO_6" at 8.158,13.293 h1.2
  text "DIR_SWDIO" at 12.708,13.293 h1.2
  text "+5V" at 10.9,10.657 h1.2
  text "GND" at 10.9,7.894 h1.2
  text ".Project" at 22.8,6.282 h6
  text "+3.3V" at 10.9,5.354 h1.2
  text "'.ReleaseDate' '.VersionRevision'" at 23.8,4.41 h2
  text "GND" at 10.9,3.037 h1.2
Mechanical 1:
  the board outline again, w0.1
Dimensions:
  lines w0.381: -5.118,-25.25 3.04,-25.25 21.595,-25.25 38.75,-25.25 51.707,-25.25 63.064,-25.25 72.422,-25.25 ; -5.118,-22.85 3.04,-22.85 21.595,-22.85 38.75,-22.85 51.707,-22.85 63.064,-22.85 72.422,-22.85 ; -5.118,-20.45 3.04,-20.45 21.595,-20.45 38.75,-20.45 51.707,-20.45 63.064,-20.45 72.422,-20.45 ; -5.118,-18.05 3.04,-18.05 21.595,-18.05 38.75,-18.05 51.707,-18.05 63.064,-18.05 72.422,-18.05 ; -5.118,-15.65 3.04,-15.65 21.595,-15.65 38.75,-15.65 51.707,-15.65 63.064,-15.65 72.422,-15.65 ; -5.118,-13.25 3.04,-13.25 21.595,-13.25 38.75,-13.25 51.707,-13.25 63.064,-13.25 72.422,-13.25 ; -5.118,-10.85 72.422,-10.85 ; 3.04,-8.45 3.04,-27.65 ; 21.595,-8.45 21.595,-27.65 ; 38.75,-8.45 38.75,-27.65 ; 51.707,-8.45 51.707,-27.65 ; 63.064,-8.45 63.064,-27.65 ; 3.04,-27.65 -5.118,-27.65 -5.118,-8.45 72.422,-8.45 72.422,-27.65 63.064,-27.65 ; 3.04,-27.65 21.595,-27.65 ; 21.595,-27.65 38.75,-27.65 ; 38.75,-27.65 51.707,-27.65 ; 51.707,-27.65 63.064,-27.65
  text "Layer" at -3.738,-10.25 h1.2
  text "Name" at 4.42,-10.25 h1.2
  text "Material" at 22.975,-10.25 h1.2
  text "Thickness" at 40.13,-10.25 h1.2
  text "Constant" at 53.087,-10.25 h1.2
  text "Gerber" at 64.444,-10.25 h1.2
  text "Top Overlay" at 4.42,-12.65 h1.2
  text "GTO" at 64.444,-12.65 h1.2
  text "Top Solder" at 4.42,-15.05 h1.2
  text "Solder Resist" at 22.975,-15.05 h1.2
  text "0.40mil" at 40.13,-15.05 h1.2
  text "3.5" at 53.087,-15.05 h1.2
  text "GTS" at 64.444,-15.05 h1.2
  text "1" at -3.738,-17.45 h1.2
  text "Top Layer" at 4.42,-17.45 h1.2
  text "1.40mil" at 40.13,-17.45 h1.2
  text "GTL" at 64.444,-17.45 h1.2
  text "Dielectric 1" at 4.42,-19.85 h1.2
  text "FR-4" at 22.975,-19.85 h1.2
  text "12.60mil" at 40.13,-19.85 h1.2
  text "4.8" at 53.087,-19.85 h1.2
  text "2" at -3.738,-22.25 h1.2
  text "Bottom Layer" at 4.42,-22.25 h1.2
  text "1.40mil" at 40.13,-22.25 h1.2
  text "GBL" at 64.444,-22.25 h1.2
  text "Bottom Solder" at 4.42,-24.65 h1.2
  text "Solder Resist" at 22.975,-24.65 h1.2
  text "0.40mil" at 40.13,-24.65 h1.2
  text "3.5" at 53.087,-24.65 h1.2
  text "GBS" at 64.444,-24.65 h1.2
  text "Bottom Overlay" at 4.42,-27.05 h1.2
  text "GBO" at 64.444,-27.05 h1.2
  text "Total board thickness:" at -3.738,-29.45 h1.2
  text "16.20mil" at 40.13,-29.45 h1.2

## Dimensions
0,0 to 0,64 on Dimensions
0,0 to 55,0 on Dimensions

## Text inside footprints (layer, text, board x,y; h text height)
L1: Top Overlay "LABS" at 15.2,4.55 h3; Top Overlay "KIN" at 15.2,6.65 h3; Top Overlay "BLIN" at 15.2,8.75 h3